# Altium PCB ESC_PCB.PcbDoc
Units mil, origin at the board's own origin, x right, y up, seen from the top; angles counter-clockwise.
Board outline 2860 x 1660 mil, 2 copper layers (Top Layer, Bottom Layer); 17 components, 22 nets, 84 pads, 3 vias.
Unrouted connection lines stored in the file: 7.
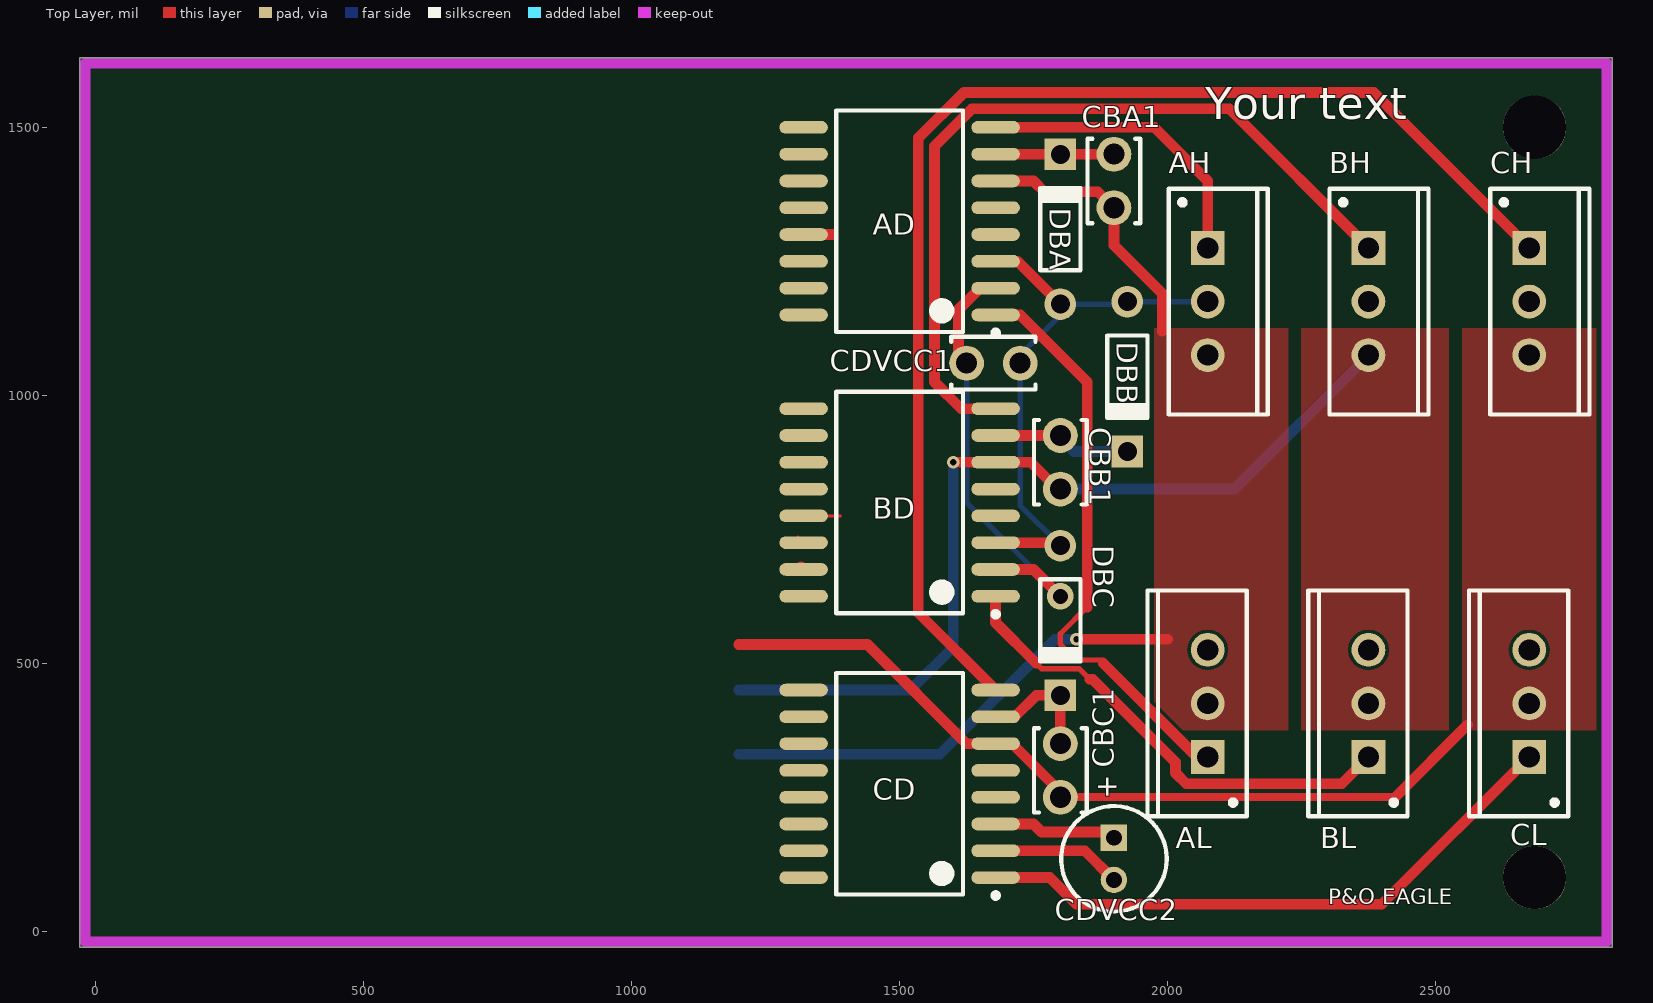
[diagram p0: Top Layer view]
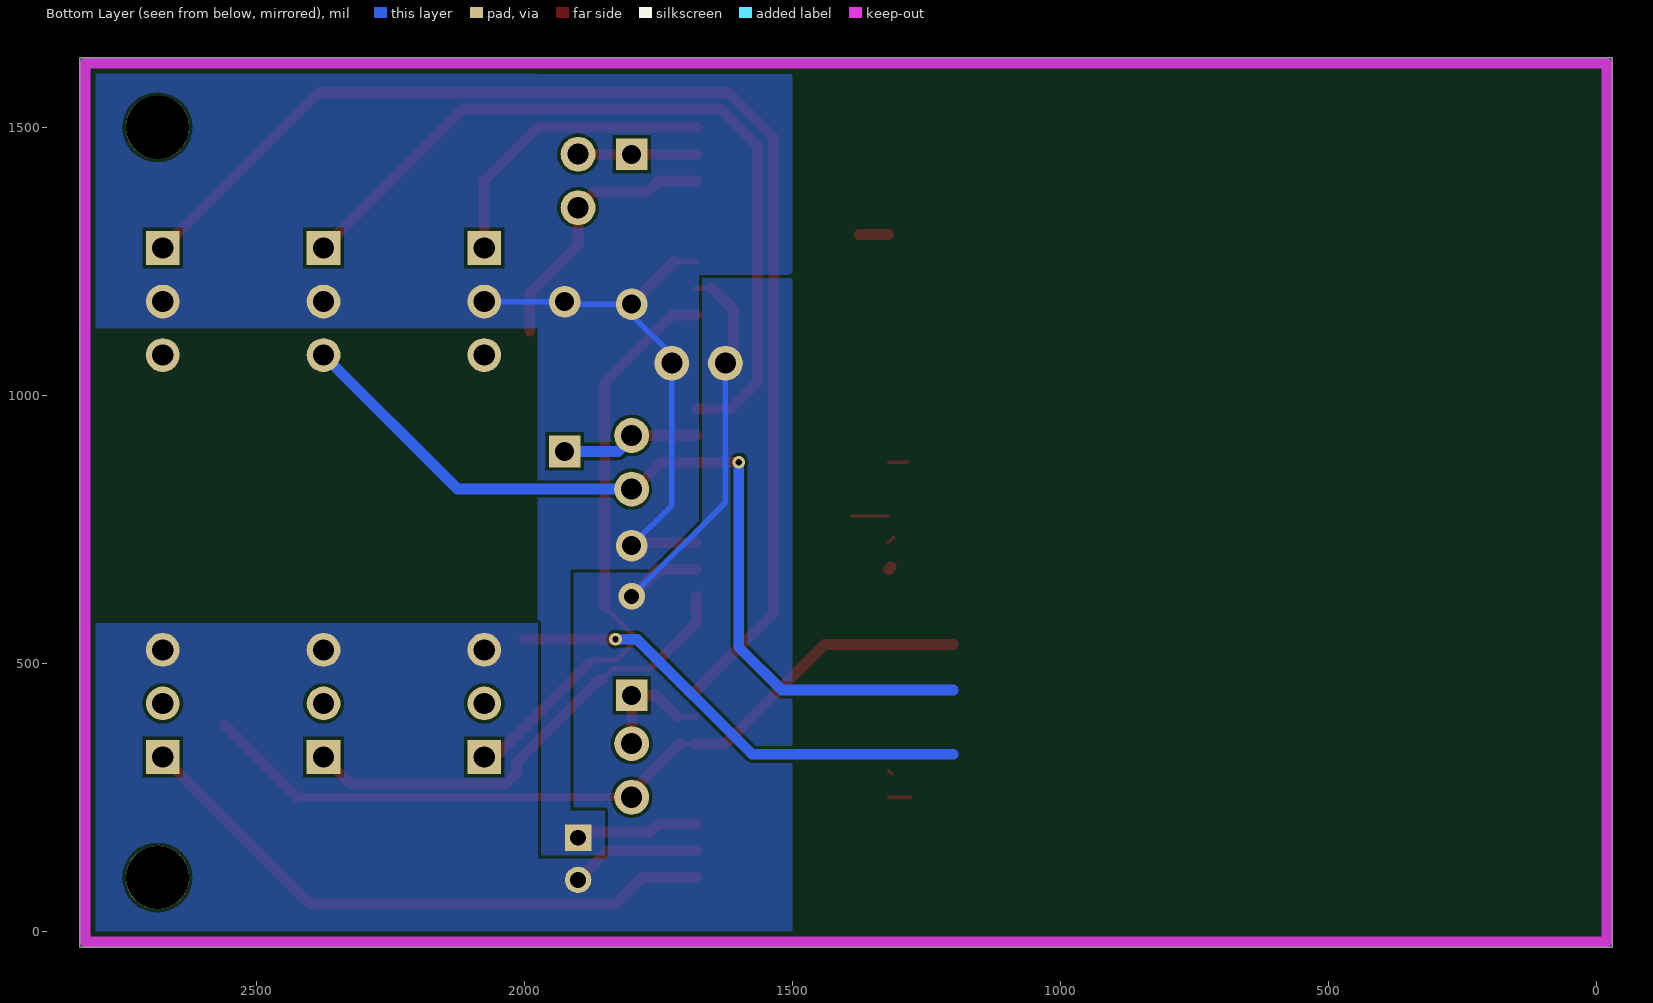
[diagram p1: Bottom Layer view, seen from below]

## Layer stack, top to bottom
Top Layer: signal copper 1.4
Dielectric: dielectric 12.6, FR-4, Dk 4.8
Bottom Layer: signal copper 1.4

## Board outline
-30,-30 2830,-30 2830,1630 -30,1630

## Design rules (kind name [scope] priority, off if disabled: settings)
Clearance [All] p1: gap=6
HoleSize [All] p1: absolutevalues=TRUE maxlimit=118.11 minlimit=11.81 maxpercent=80.000 minpercent=20.000
MinimumSolderMaskSliver [All] p1: minsoldermaskwidth=1
PlaneConnect [All] p1: planeconnectstyle=Direct reliefexpansion=20 reliefentries=4 reliefconductorwidth=10 reliefairgap=10
PolygonConnect [All] p1: connectstyle=Direct reliefconductorwidth=10 reliefentries=4 polygonreliefangle="90 Angle" airgapwidth=10
RoutingVias [All] p1: holewidth=28 width=50 viastyle="Through Hole" minholewidth=11.81 minwidth=23.62 maxholewidth=28 maxwidth=50
SilkToSilkClearance [All] p1: silktosilkclearance=0
SilkscreenOverComponentPads [All] p1: minsilkscreentomaskgap=1
SolderMaskExpansion [All] p1: expansion=4
Width [All] p1: maxlimit=600 minlimit=6 preferedwidth=6
23 further rules are at their usual default settings.

## Classes and differential pairs
component class ESC_PCB: AD AH AL BD BH BL CBA1 CBB1 CBC1 CD CH CL DBA DBB DBC

## Components (designator, comment, footprint, x,y, rotation, side; value= is the part's Value field where it differs from the comment)
AD "IR2110S" SOIC16_N 1500,1325 r180 top locked
AH "IRFSL4710" TO-262 2075,1175 r270 top
AL "IRFSL4710" TO-262 2075,425 r90 top
BD "IR2110S" SOIC16_N 1500,800 r180 top
BH "IRFSL4710" TO-262 2375,1175 r270 top
BL "IRFSL4710" TO-262 2375,425 r90 top
CBA1 "100nF" VP31-2.5 1900,1400 r90 top
CBB1 "100nF" VP31-2.5 1800,875 r90 top
CBC1 "100nF" VP31-2.5 1800,300 r90 top locked
CD "IR2110S" SOIC16_N 1500,275 r180 top
CDVCC1 "100nF" VP31-2.5 1675,1060 r0 top
CDVCC2 "EKF00MP133J00" CAPPR2-5X5 1900,135 r270 top
CH "IRFSL4710" TO-262 2675,1175 r270 top
CL "IRFSL4710" TO-262 2675,425 r90 top
DBA "Diode 1N4148" DO-35 1800,1310 r90 top
DBB "Diode 1N4148" DO-35 1925,1035 r270 top
DBC "Diode 1N4148" DO-35 1800,579.76 r270 top

## Footprints (in the part's own frame and the unit in brackets; to place one, negate y for a bottom-side part, rotate by r counter-clockwise, add the part's x,y. Pads: shape width x height; smd on the part's side, far side on the other; paste and mask are expansions set on the pad)
CAPPR2-5X5 [mm] "Capacitor, Electrolytic, Radial; Body 5 x 5 mm (Dia.xH typ); Pin Spacing 2 mm (typ)"
  rect 1.25x1.25 hole 0.75: 1(-1,0)
  round 1.25 hole 0.75: 2(1,0)
  silkscreen extent -2.5,-2.5 2.5,2.5
DO-35 [mm] "Diode, Axial; Body 3.8 x 1.9 mm (LxDia. max), Lead Dia. 0.53 mm (max)"
  round 1.5 hole 0.9: 1(-3.55,0)
  rect 1.5x1.5 hole 0.9: 2(3.55,0)
  silkscreen extent -1.95,-0.95 2.05,0.95
SOIC16_N [mm] "SOIC, 16-Leads, Body 10.3x7.5mm, Pitch 1.27mm, IPC Medium Density"
  oval 2.3x0.6 smd: 1(-4.55,4.445) 2(-4.55,3.175) 3(-4.55,1.905) 4(-4.55,0.635) 5(-4.55,-0.635) 6(-4.55,-1.905) 7(-4.55,-3.175) 8(-4.55,-4.445) 9(4.55,-4.445) 10(4.55,-3.175) 11(4.55,-1.905) 12(4.55,-0.635) 13(4.55,0.635) 14(4.55,1.905) 15(4.55,3.175) 16(4.55,4.445)
  silkscreen extent -4.67,-5.25 3,5.42, body extent -3.75,-5.15 3.75,5.15, height 2.65
TO-262 [mm] "TO, Thru-Hole, Vertical, Heatsink Mounted; 3 In-Line Leads; Pitch 2.54 mm"
  rect 1.6x1.6 hole 1: 1(-2.54,0)
  round 1.6 hole 1: 2(0,0) 3(2.54,0)
  silkscreen extent -5.35,-1.85 5.35,2.85, body extent -5.4,-1.9 5.4,2.9, height 14.6
VP31-2.5 [mm] "Capacitor, Ceramic, Thru-Hole, Dipped Radial; Body 4 x 2.5 mm (WxT) Pin Spacing 2.54 mm (typ)"
  round 1.65 hole 1: 1(-1.27,0) 2(1.27,0)
  silkscreen extent -2,-1.25 2,1.25

## Part data
AD BD CD: "High and Low Side Driver"
AH AL BH BL CH CL: "HEXFET Power MOSFET"
CBA1 CBB1 CBC1 CDVCC1: library part VP31BY103, "Dipped Radial Multilayer Ceramic Capacitor X7R: 10nF"
CDVCC2: "Aluminum Electrolytic Capacitor, Radial Style with Long Leads: 3.3uF, 63V"
DBA DBB DBC: "High Conductance Fast Diode"

## Free pads (board coordinates)
  round 118.11 hole 118.11 unplated: 7(2685,1500) 8(2685,100)

## Via types
v1: diameter 23.62, hole 11.81, Top Layer to Bottom Layer, 2 vias
v2: diameter 50, hole 28, Top Layer to Bottom Layer, 1 vias

## Nets (pads, with @x,y where several pads share a name; then routed paths per layer and width w, separated by ;. In a path a pad name is that pad's centre, name@x,y a point inside that pad or via, vN(x,y) a via of type N, cw(c..) or ccw(c..) an arc to the next point about the centre after c; other vN are vias at no path point)
A: AD.6 AH.3 AL.2 CBA1.1 | length 1397.9
  Top Layer w20: AD.6 1750,1400 1770,1380 1870,1380 CBA1.1 1900,1280 1990,1190 1990,1120 ; v1(1830,545) 2000,545
  Bottom Layer w20: 1200,330 1575,330 1790,545 v1(1830,545)
AHGATE: AD.8 AH.1 | length 562.3
  Top Layer w20: AD.8 1975,1500 2075,1400 AH.1
AHIN: AD.12
ALGATE: AD.1 AL.1 | length 1098.5
  Top Layer w10: 1850,605 1800,555 1800,535 1829,506 1879.47,506 1880,505.47 1880,500 ; AL.1@2055,325 AL.1
  Top Layer w20: AD.1 1725,1150 1850,1025 1850,605 ; 1880,500 AL.1@2055,325
ALIN: AD.14
B: BD.6 BH.3 BL.2 CBB1.1 | length 1679.5
  Top Layer w20: v1(1600,875) BD.6 1745,875 CBB1.1@1800,820
  Bottom Layer w20: 1200,450 1520,450 1600,530 v1(1600,875) ; CBB1.1 2125,825 BH.3
BHGATE: BD.8 BH.1 | length 1521.5
  Top Layer w20: BD.8 1615,975 1565,1025 1565,1465 1635,1535 2115,1535 BH.1
BHIN: BD.12
BLGATE: BD.1 BL.1 | length 902
  Top Layer w10: 1755,500 1765,490 1835,490 1855,470
  Top Layer w20: BD.1 1679.13,575.87 1755,500 ; 1855,470 1860,470 2015,315 2015,295 2035,275 2325,275 BL.1
BLIN: BD.14 | length 14.1
  Top Layer w6: BD.14@1310.87,735 BD.14
C: CBC1.1 CD.6 CH.3 CL.2 | length 1539.8
  Top Layer w10: CD.6 CD.6@1710,350
  Top Layer w15: CBC1.1 2425,250
  Top Layer w20: 1200,535 1440,535 1625,350 CD.6 ; CD.6@1710,350 1800,260 CBC1.1 ; 2425,250 2560,385
CHGATE: CD.8 CH.1 | length 2385
  Top Layer w20: CD.8 1535,594.13 1535,1480 1620,1565 2385,1565 CH.1
CHIN: CD.12 | length 9.3
  Top Layer w6: CD.12@1314.31,293.44 CD.12
CLGATE: CD.1 CL.1 | length 1130.5
  Top Layer w20: CD.1 1780,100 1830,50 2400,50 CL.1
CLIN: CD.14
GND: AD.2 AD.15 AL.3 BD.2 BD.15 BL.3 CD.2 CD.15 CDVCC1.1 CDVCC2.2 CL.3 | length 1108.7
  Top Layer w10: CDVCC1.1@1610,1075 CDVCC1.1 ; AD.2@1650,1200 AD.2
  Top Layer w20: BD.15@1315.87,680 BD.15 ; CDVCC1.1@1610,1075 1610,1160 AD.2@1650,1200 ; CD.2 1845.63,150 CDVCC2.2 ; BD.2 1750,675 v2(1800,625)
  Bottom Layer w10: CDVCC1.1 1625,800 v2(1800,625) v2@1817.26,625
SDIN: AD.13 BD.13 CD.13 | length 164.1
  Top Layer w6: CD.13@1280,250 CD.13 ; BD.13 1390,775
  Top Layer w20: AD.13 1375,1300
VBA: AD.7 CBA1.2 DBA.2 | length 221.1
  Top Layer w10: DBA.2@1799.76,1450 DBA.2 ; CBA1.2@1899.76,1449.76 CBA1.2
  Top Layer w20: AD.7 DBA.2@1799.76,1450 ; DBA.2 CBA1.2@1899.76,1449.76
VBB: BD.7 CBB1.2 DBB.2 | length 261.1
  Top Layer w20: BD.7 CBB1.2
  Bottom Layer w10: CBB1.2@1800,920 CBB1.2
  Bottom Layer w20: CBB1.2@1800,920 1824.76,895.24 DBB.2
VBC: CBC1.2 CD.7 DBC.2 | length 227.4
  Top Layer w10: CD.7 CD.7@1715,400
  Top Layer w20: CD.7@1715,400 1755,440 DBC.2 CBC1.2
VCC: AD.3 AH.2 BD.3 BH.2 CD.3 CDVCC1.2 CDVCC2.1 CH.2 DBA.1 DBB.1 DBC.1 | length 1303.8
  Top Layer w10: AD.3 AD.3@1720.24,1250 ; DBC.1@1794.53,725 DBC.1 ; CDVCC2.1@1889.37,185 CDVCC2.1
  Top Layer w20: CD.3 1750,200 1765,185 CDVCC2.1@1889.37,185 ; BD.3 DBC.1@1794.53,725 ; AD.3@1720.24,1250 DBA.1
  Bottom Layer w10: DBC.1@1805.47,719.53 DBC.1 1725,794.53 CDVCC1.2 1725,1075 1800,1150 DBA.1 1920.47,1170.24 DBB.1 2074.76,1174.76 AH.2
VDD: AD.11 BD.11 CD.11 | length 35.9
  Top Layer w6: BD.11@1285,875 BD.11
pads on no net: AD.4 AD.5 AD.9 AD.10 AD.16 BD.4 BD.5 BD.9 BD.10 BD.16 CD.4 CD.5 CD.9 CD.10 CD.16

## Polygon pours and split planes (outlines as drawn)
C on Top Layer "Top Layer-No Net" (solid, remove dead copper, pour order 6): 2550,1125 2800,1125 2800,375 2550,375
B on Top Layer "Top Layer-No Net" (solid, remove dead copper, pour order 4): 2250,1125 2525,1125 2525,375 2250,375 2250,1125
A on Top Layer "Top Layer-No Net" (solid, remove dead copper, pour order 2): 1975,1125 2225,1125 2225,375 1975,375
GND on Bottom Layer "Top Layer-No Net" (solid, remove dead copper, pour order 108): 1500,125 1925,125 1925,700 1500,700
VCC on Bottom Layer "Top Layer-No Net" (solid, remove dead copper, pour order 106): 1850,135 1850,225 1915,225 1915,675 1975,675 1975,135
GND on Bottom Layer "Top Layer-No Net" (solid, remove dead copper, pour order 104): 1500,1225 1845,1225 1845,301.73 1843.35,300 1500,300
VCC on Bottom Layer "Top Layer-No Net" (solid, remove dead copper, pour order 102): 1675,1225 1675,675 1975,675 1975,1225
VCC on Bottom Layer "Top Layer-No Net" (solid, pour order 98): 1500,1600 1500,1225 1975,1225 1975,1599.09
GND on Bottom Layer "Top Layer-No Net" (solid, remove dead copper, pour order 14): 1975,0 1975,135 1500,135 1500,0
GND on Bottom Layer "Top Layer-No Net" (solid, remove dead copper, pour order 10): 1975,575 1975,5 1975,0 2800,0 2800,575
VCC on Bottom Layer "Top Layer-No Net" (solid, remove dead copper, pour order 8): 1975,1125 2800,1125 2800,1600 1975,1600

## Keep-outs
Keep-Out Layer:
  lines w19.68: -20,-20 -20,1620 2820,1620 2820,-20 -20,-20

## Silkscreen, mask and mechanical layers (free items; w line width, h text height)
Top Overlay:
  text "Your text" at 2070,1515 h60
  text "P&O EAGLE" at 2300,50 h29.53
Top Solder:
  rectangle: 2575,665 2775,935
  rectangle: 2275,665 2500,935
  rectangle: 2000,665 2200,935
Bottom Solder:
  rectangle: 2075,35 2525,235
  rectangle: 2070,1390 2525,1565

## Text inside footprints (layer, text, board x,y; h text height)
CDVCC2: Top Overlay "+" at 1870.47,291.5 h39.37 r270